# Altium PCB NiMH Battery Charger.PcbDoc
Units mil, origin at the board's own origin, x right, y up, seen from the top; angles counter-clockwise.
Board outline 2050 x 1425 mil, 2 copper layers (Top Layer, Bottom Layer); 36 components, 25 nets, 108 pads, 22 vias.
Unrouted connection lines stored in the file: 1.
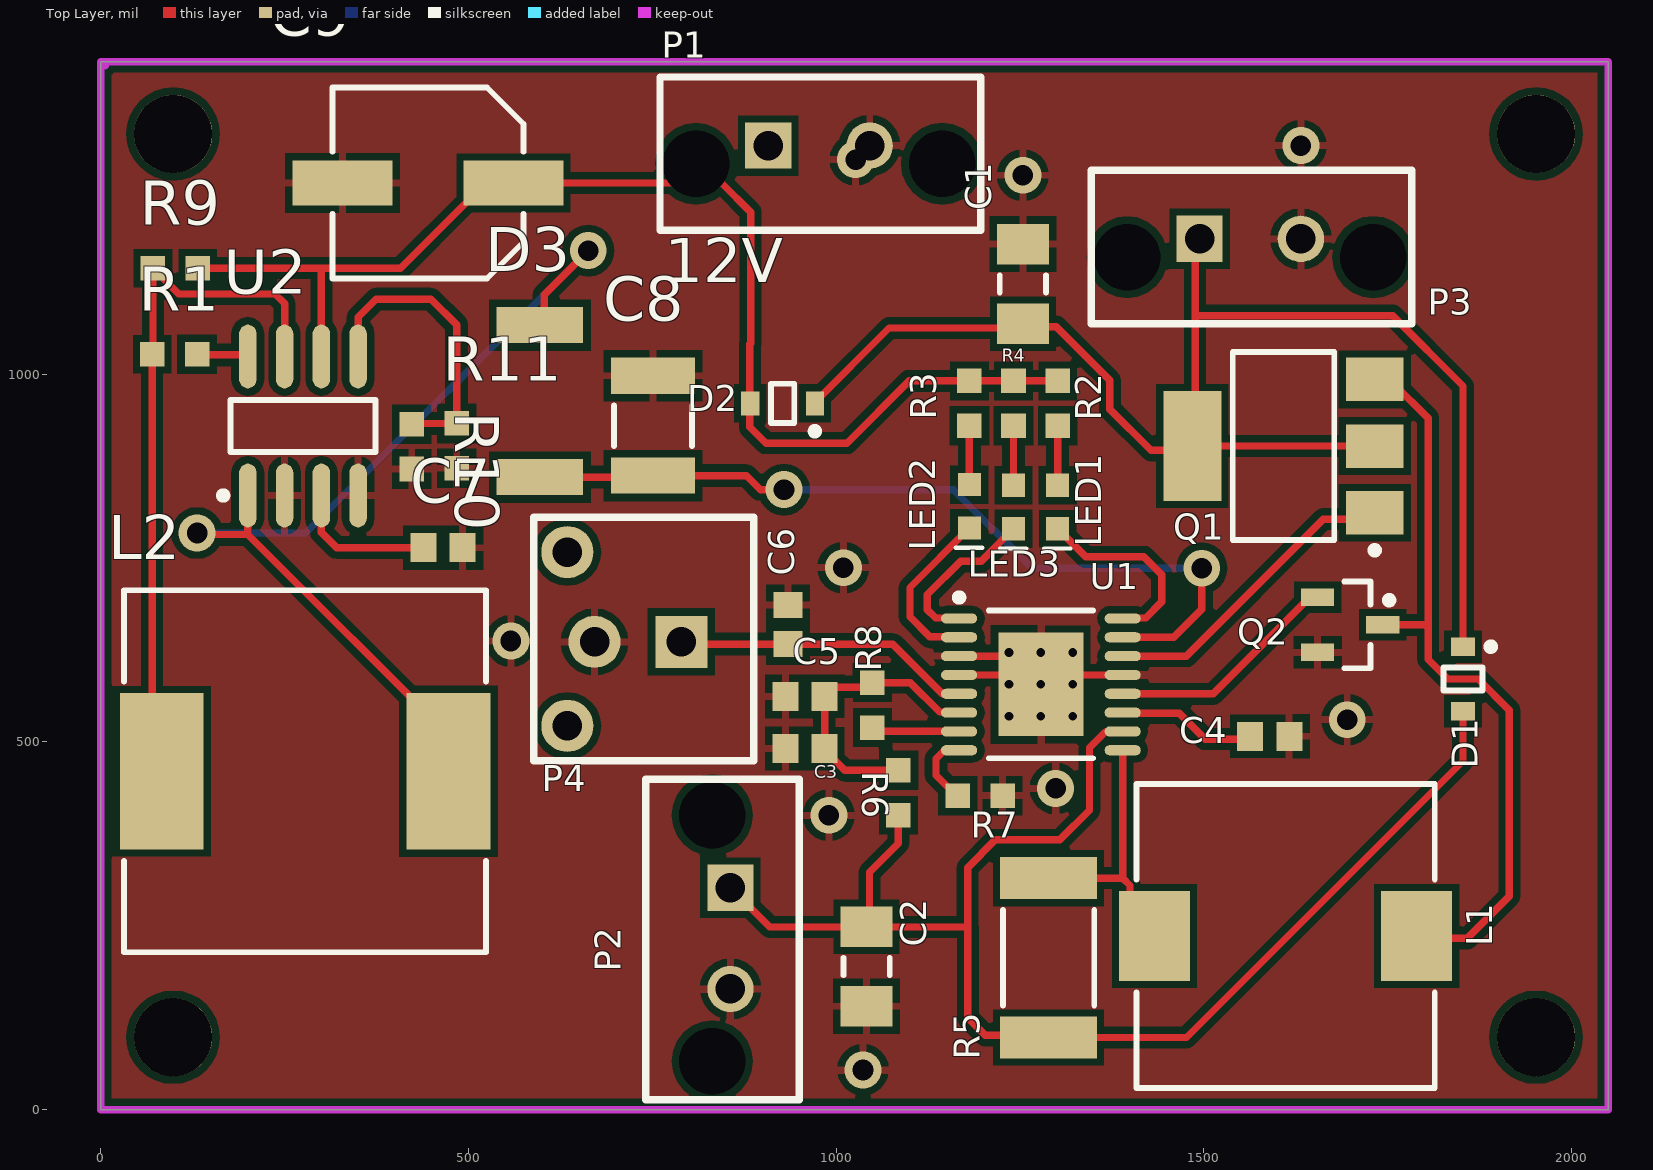
[diagram p0: Top Layer view]
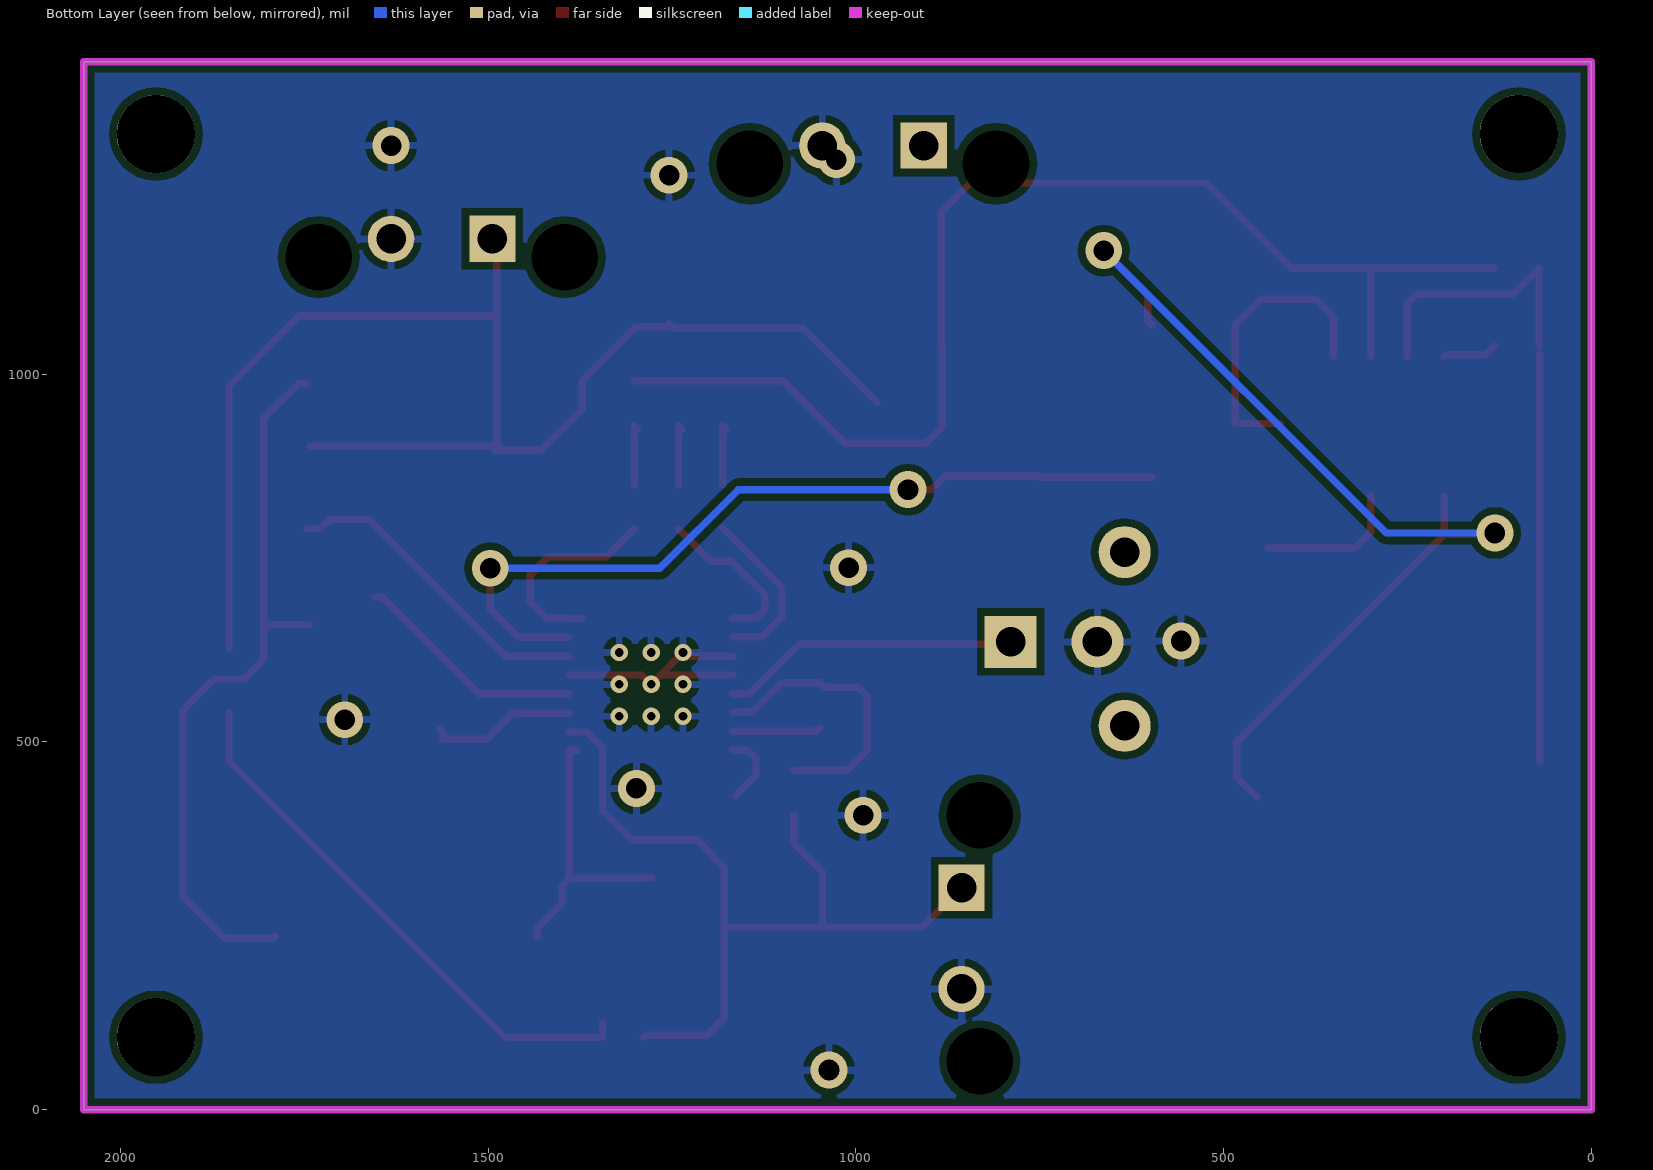
[diagram p1: Bottom Layer view, seen from below]
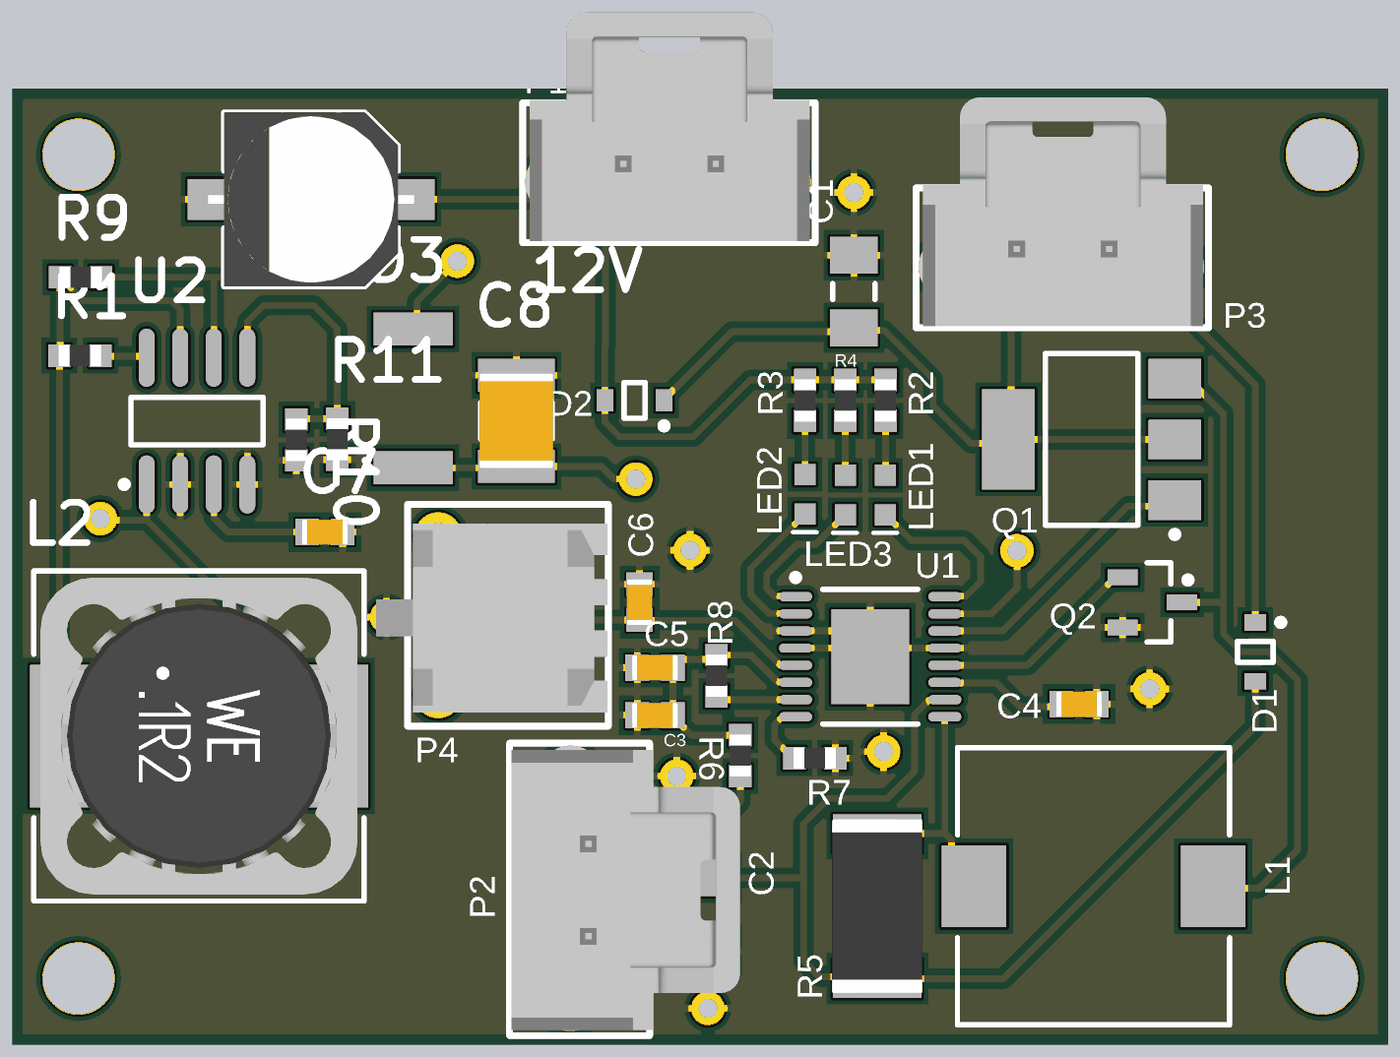
[diagram p2: 3D render of the assembled board from above, using the file's embedded part models]

## Layer stack, top to bottom
Top Solder: solder mask 0.4, Solder Resist, Dk 3.5
Top Layer: signal copper 1.4
Dielectric 1: dielectric 12.6, FR-4, Dk 4.8
Bottom Layer: signal copper 1.4
Bottom Solder: solder mask 0.4, Solder Resist, Dk 3.5

## Board outline
0,0 2050,0 2050,1425 0,1425

## Design rules (kind name [scope] priority, off if disabled: settings)
Clearance [All] p1: gap=10 ignorepadtopadclearanceinfootprint=FALSE except(0: Arc-Hole Track-Hole SMDPad-Hole THPad-Hole Via-Hole Fill-Hole Poly-Hole Region-Hole Text-Hole)
PolygonConnect [All] p1: connectstyle=Relief reliefconductorwidth=10 reliefentries=4 polygonreliefangle="90 Angle" airgapwidth=10
RoutingVias [All] p1: holewidth=28 width=50 viastyle="Through Hole" minholewidth=28 minwidth=50 maxholewidth=28 maxwidth=50
SolderMaskExpansion [All] p1: expansion=4
Width [All] p1: maxlimit=10 minlimit=10 preferedwidth=10
30 further rules are at their usual default settings.

## Classes and differential pairs
component class "NiMH Battery Charger": C1 C2 C3 C4 C5 C6 C7 C8 C9 D1 D2 D3 L1 L2 LED1 LED2 LED3 P1 P2 P3 P4 Q1 Q2 R1 R2 R3 R5 R6 R7 R9 R11 U1 U2

## Components (designator, comment, footprint, x,y, rotation, side; value= is the part's Value field where it differs from the comment)
C1 "CAP CER 10uF 50V 20% X5R 1206" "CAP, 1206" 1253.91,1122.73 r90 top
C2 "CAP CER 10uF 50V 20% X5R 1206" "CAP, 1206" 1041.31,194.58 r270 top
C3 "CAP CER 10nF 50V 5% X7R 0603" "CAP, 0603" 957.65,490.84 r180 top
C4 "CAP CER 0.1UF 50V 10% X7R 0603" "CAP, 0603" 1589.54,507.57 r0 top
C5 "CAP CER 10nF 50V 5% X7R 0603" "CAP, 0603" 957.65,561.71 r180 top
C6 "68nF" "CAP, 0603" 934.56,659.43 r90 top
C7 "1500PF, 50V" "CAP, 0603" 465.57,764 r0 top
C8 "CAP CER 330UF 6.3V X5R 1210" "CAP, 1210" 751,929.91 r90 top
C9 "100UF" "CAP ALUM 6.3MM RADIAL SMD" 444.94,1260 r180 top
D1 "NSR1020MW2T3G" ONSC-SOD-323-2-477-02_V 1852.17,585.49 r270 top
D2 "NSR1020MW2T3G" ONSC-SOD-323-2-477-02_V 927.13,960.33 r180 top
D3 "40V 1A" MELF 597,963.35 r90 top
L1 "IND 10UH 2.8A 59 MOHM SMD" INDP100102X31N 1611.19,235.92 r180 top
L2 "180 µH" WE-PD-XL 277.88,460 r0 top
LED1 "LED GREEN CLEAR 2V 0603" LED_0603 1300.76,846.91 r270 top
LED2 "LED YELLOW CLEAR 2.1V 0603" LED_0603 1180.76,847.85 r270 top
LED3 "LED RED CLEAR 2V 0603" LED_0603 1240.76,846.91 r270 top
P1 "CONN 2POS ULTRA-FIT 0.138\"" "CONN, 2POS ULTRA-FIT" 907.78,1310.8 r0 top
P2 "CONN 2POS ULTRA-FIT 0.138\"" "CONN, 2POS ULTRA-FIT" 856.27,301.87 r270 top
P3 "CONN 2POS ULTRA-FIT 0.138\"" "CONN, 2POS ULTRA-FIT" 1494.06,1183.95 r0 top
P4 "CONN 2POS MICRO-FIT 3mm" "CONN, 2POS MICRO-FIT" 789.56,639.94 r90 top
Q1 "NTF2955T1G" ONSC-SOT-223-4-318E-04_V 1608.24,902.26 r0 top
Q2 "MOSFET N-CHANNEL 20V 4A SOT23F" SOT23 1698.79,659.15 r0 top
R1 "180Ω" "RES, 0603" 100.49,1027 r180 top
R2 "RES 10K OHM 1% 1/10W 0603" "RES, 0603" 1301.15,960.33 r270 top
R3 "RES 10K OHM 1% 1/10W 0603" "RES, 0603" 1181.15,960.33 r270 top
R4 "RES 10K OHM 1% 1/10W 0603" "RES, 0603" 1241.15,960.33 r270 top
R5 "0.05Ω" RESC6432X89X76LL25T25 1288.85,206.39 r270 top
R6 "180k" "RES, 0603" 1084.61,430.8 r270 top
R7 "49.9k" "RES, 0603" 1195.83,426.87 r180 top
R8 "20k" "RES, 0603" 1049.18,549.9 r90 top
R9 "0.22Ω" "RES, 0603" 101.51,1144 r180 top
R10 "2.21K" "RES, 0603" 423,901.49 r270 top
R11 "47K" "RES, 0603" 484,902.49 r270 top (schematic designator D4)
U1 "LTC4010CFE#PBF" LT-FE-16-EPV-BC_L 1278.34,578.2 r0 top
U2 "MC34063ACD-TR" SO8_N 275,929.51 r90 top

## Footprints (in the part's own frame and the unit in brackets; to place one, negate y for a bottom-side part, rotate by r counter-clockwise, add the part's x,y. Pads: shape width x height; smd on the part's side, far side on the other; paste and mask are expansions set on the pad)
"CAP ALUM 6.3MM RADIAL SMD" [mm] "Aluminum Electrolytic Capacitor, Body 6.50x6.50x5.50mm, IPC Low Density"
  rect 3.45x1.55 smd: 1(-2.95,0) 2(2.95,0)
  silkscreen extent -3.3,-3.3 3.3,3.3, body extent -3.9,-3.3 3.9,3.3, height 5.5
"CAP, 0603" [mm] "Chip Capacitor, 2-Leads, Body 1.60x0.81mm, IPC Medium Density"
  rect 0.9x1 smd mask+0.076: 1(-0.675,0) 2(0.675,0)
  body extent -0.87,-0.48 0.87,0.48, height 0.9
"CAP, 1206" [mm] "Chip Capacitor, 2-Leads, Body 3.20x1.60mm, IPC Medium Density"
  rect 1.4x1.8 smd: 1(-1.375,0) 2(1.375,0)
  silkscreen extent -0.3,-0.8 0.3,0.8, body extent -1.68,-0.87 1.67,0.87, height 1.8
"CAP, 1210" [mm] "Chip Capacitor, 2-Leads, Body 3.20x2.50mm, IPC Low Density"
  rect 1.25x2.9 smd: 1(-1.725,0) 2(1.725,0)
  silkscreen extent -0.7,-1.35 0.7,1.35, body extent -1.8,-1.4 1.8,1.4, height 2.8
"CONN, 2POS MICRO-FIT" [mm]
  round 1.8 hole 1.02: 0(-3,3.94) 0(3,3.94) 2(-0.1,3)
  rect 1.8x1.8 hole 1.02: 1(-0.1,0)
  silkscreen extent -4.2,-2.5 4.2,5.1, body extent -3.67,-2.47 3.48,6.3, height 9.95
"CONN, 2POS ULTRA-FIT" [mm] "2 Positions Header, Shrouded Connector 0.138\" (3.50mm) Through Hole Gold"
  rect 1.6x1.6 hole 1.02: 1(0,0)
  round 1.6 hole 1.02: 2(3.5,0)
  round 1.6 hole 2.3: ""(-2.5,-0.63) ""(6,-0.63)
  silkscreen extent -3.74,-2.93 7.33,2.37, body extent -3.48,-2.87 7.12,5.79, height 13.85
INDP100102X31N [mm] "Precision Wire Wound Inductor, 2-Leads, Body 10.00x10.20mm, IPC Medium Density"
  rect 2.45x3.1 smd: 1(-4.525,0) 2(4.525,0)
  silkscreen extent -5.15,-5.25 5.15,5.25, body extent -5.15,-5.25 5.15,5.25, height 3.1
LED_0603 [mm]
  rect 0.8x0.8 smd: 1(-0.05,0.01) 2(1.45,0.01)
  silkscreen extent 2.13,-0.46 2.13,0.45, body extent -0.09,-0.39 1.51,0.41, height 0.8
LT-FE-16-EPV-BC_L [mm] "SOP, 16-Leads, Body 5.1x4.5mm, Pitch 0.65mm, Thermal Pad 3.58x2.94mm, IPC High Density"
  oval 1.25x0.35 smd: 1(-2.825,2.275) 2(-2.825,1.625) 3(-2.825,0.975) 4(-2.825,0.325) 5(-2.825,-0.325) 6(-2.825,-0.975) 7(-2.825,-1.625) 8(-2.825,-2.275) 9(2.825,-2.275) 10(2.825,-1.625) 11(2.825,-0.975) 12(2.825,-0.325) 13(2.825,0.325) 14(2.825,0.975) 15(2.825,1.625) 16(2.825,2.275)
  rect 2.94x3.58 smd: 17(0,0)
  silkscreen extent -2.95,-2.55 1.8,3.12, body extent -2.25,-2.55 2.25,2.55, height 1.1
MELF [mm]
  rect 1.25x3 smd: 1(2.625,0) 2(-2.625,0)
ONSC-SOD-323-2-477-02_V [mm] "SOD, 2-Leads, Body 1.7x1.25mm"
  rect 0.63x0.83 smd: 1(-1.115,0) 2(1.115,0)
  silkscreen extent -1.24,-0.67 0.4,1.09, body extent -0.85,-0.63 0.85,0.63, height 1.06
ONSC-SOT-223-4-318E-04_V [mm] "SOT223, 4-Leads"
  rect 2x1.5 smd: 1(3.15,-2.3) 2(3.15,0) 3(3.15,2.3)
  rect 2x3.8 smd: 4(-3.15,0)
  silkscreen extent -1.75,-3.72 3.27,3.25, body extent -1.75,-3.25 1.75,3.25, height 1.75
"RES, 0603" [mm] "Chip Resistor, 2-Leads, Body 1.60x0.80mm, IPC Medium Density"
  rect 0.85x0.85 smd: 1(-0.775,0) 2(0.775,0)
  body extent -0.8,-0.4 0.8,0.4, height 0.55
RESC6432X89X76LL25T25 [mm] "Chip Resistor, 2-Leads, Body 6.6x3.43mm, IPC High Density"
  rect 1.45x3.35 smd: 1(-2.75,0) 2(2.75,0)
  silkscreen extent -1.65,-1.58 1.65,1.58, body extent -3.3,-1.72 3.3,1.72, height 0.89
SO8_N [mm] "SOIC, 8-Leads, Body 4.9x3.9mm, Pitch 1.27mm, IPC Medium Density"
  oval 2.2x0.6 smd: 1(-2.4,1.905) 2(-2.4,0.635) 3(-2.4,-0.635) 4(-2.4,-1.905) 5(2.4,-1.905) 6(2.4,-0.635) 7(2.4,0.635) 8(2.4,1.905)
  silkscreen extent -2.52,-2.5 0.9,2.88, body extent -2,-2.5 2,2.5, height 1.75
SOT23 [mm] "SOT23, 3-Leads, Body 2.9x1.3mm, Pitch 0.95mm, Lead Span 2.3mm - Reverse Pinning, IPC Medium Density"
  rect 1.15x0.6 smd: 1(1.125,0) 2(-1.125,-0.95) 3(-1.125,0.95)
  silkscreen extent -0.2,-1.5 1.48,1.5, body extent -0.7,-1.5 0.7,1.5, height 1.1
WE-PD-XL [mm] "SMD Inductor, 2-Leads, Body 12.0 x 12.0 mm"
  rect 2.9x5.4 smd: 1(-4.95,0) 2(4.95,0)
  silkscreen extent -6.25,-6.25 6.25,6.25, body extent -6,-6 6,6, height 7.99

## Part data
C1 C2: "10μF ±20% 50V Ceramic Capacitor X5R 1206 (3216 Metric)", Capacitance="10 uF", Case/Package=1206, Case Code (Metric)=3216, Manufacturer=Murata, Manufacturer Part Number=GRT31CR61H106ME01L, Max Operating Temperature=85°C, Min Operating Temperature=-55°C, Rating=X5R, Ratings=AEC-Q200, Supplier Part Number 1=490-12457-1-ND, Tolerance=20%, Voltage Rating=50V, Case Code (Imperial)=1206, Length=0.126inch, Mount="Surface Mount", Packaging="Tape and Reel", Pricing 1="1 = 0.57000, 10 = 0.39800, 100 = 0.23910, 500 = 0.17930, 1000 = 0.15141 (USD)", RoHS=Yes, Stock 1=449467, Supplier 1=Digi-Key, Thickness=0.071inch, Width=0.063inch
C3 C5: "10000pF ±5% 50V Ceramic Capacitor U2J 0603 (1608 Metric)", Capacitance=10000pF, Manufacturer 1=KEMET, Manufacturer Part Number 1=C0603C103J5JAC7867, Operating Temperature="-55°C ~ 125°C", Package / Case="0603 (1608 Metric)", Ratings=-, Supplier Part Number 1=399-13384-1-ND, Temperature Coefficient=U2J, Tolerance=±5%, Voltage=50V, ComponentLink1Description=http://www.kemet.com/docfinder?Partnumber=C0603C103J5JAC7867, ComponentLink1URL=http://www.kemet.com/docfinder?Partnumber=C0603C103J5JAC7867, Failure Rate=-, Height - Seated (Max)=-, Lead Spacing=-, Lead Style=-, Mounting Type="Surface Mount, MLCC", Packaging="Cut Tape (CT)", Part Status=Active, Size / Dimension="0.063\" L x 0.032\" W (1.60mm x 0.80mm)", Supplier 1=Digi-Key, Thickness (Max)="0.034\" (0.87mm)"
C4: "0.10μF ±10% 50V Ceramic Capacitor X7R 0603 (1608 Metric)", Capacitance=0.1μF, Manufacturer 1="AVX Corporation", Manufacturer Part Number 1=06035C104KAT2A, Operating Temperature="-55°C ~ 125°C", Package / Case="0603 (1608 Metric)", Ratings=-, Supplier Part Number 1=478-5052-1-ND, Temperature Coefficient=X7R, Tolerance=±10%, Voltage=50V, ComponentLink1Description=http://datasheets.avx.com/X7RDielectric.pdf, ComponentLink1URL=http://datasheets.avx.com/X7RDielectric.pdf, Height - Seated (Max)=-, Lead Spacing=-, Lead Style=-, Mounting Type="Surface Mount, MLCC", Packaging="Cut Tape (CT)", Part Status=Active, Size / Dimension="0.063\" L x 0.032\" W (1.60mm x 0.81mm)", Supplier 1=Digi-Key, Thickness (Max)="0.035\" (0.90mm)"
C6: library part "CAP CER 0.068UF 10% 50V X7R 0603", "0.068μF 50V Ceramic Capacitor X7R 0603 (1608 Metric) 0.063\" L x 0.032\" W (1.60mm x 0.80mm)", Case/Package=0603, Case Code (Metric)=1608, Dielectric=X7R, Manufacturer=Murata, Manufacturer Part Number=GCM188R71H683KA57D, Max Operating Temperature=125°C, Min Operating Temperature=-55°C, Package Quantity=4000, Supplier Part Number 1=490-8027-1-ND, Tolerance=10%, Voltage Rating=50V, Capacitance=68nF, Case Code (Imperial)=0603, ComponentLink1Description=https://datasheet.ciiva.com/29542/s0717e-29542427.pdf, ComponentLink1URL=https://datasheet.ciiva.com/29542/s0717e-29542427.pdf, ComponentLink2Description=https://datasheet.ciiva.com/29542/s0717e-29542428.pdf, ComponentLink2URL=https://datasheet.ciiva.com/29542/s0717e-29542428.pdf, ComponentLink3Description=https://datasheet.ciiva.com/29542/s0717e-29542429.pdf, ComponentLink3URL=https://datasheet.ciiva.com/29542/s0717e-29542429.pdf, Depth=0.8mm, Height=0.8mm, Length=1.6mm, Mount="Surface Mount", Packaging="Tape and Reel", Pricing 1="1=0.16, 10=0.116, 100=0.0547, 500=0.03832, 1000=0.03172 (USD)", Radiation Hardening=No, Stock 1=40000, Supplier 1=Digi-Key, Termination=SMD/SMT, Thickness=0.035inch, Voltage Rating (DC)=50V, Width=0.031inch
C7: library part "CAP, 1500PF, 50V, 10%, X7R, 0603", "KEMET - C0603C152K5RACTU - CAP, 1500PF, 50V, 10%, X7R, 0603", Capacitance=1.5nF, Case/Package=0603, Case Code (Metric)=1608, Dielectric=X7R, Dielectric Material=Ceramic, Manufacturer 1=KEMET, Manufacturer Part Number 1=C0603C152K5RACTU, Max Operating Temperature=125°C, Min Operating Temperature=-55°C, Package Quantity=1, Tolerance=10%, Voltage=50V, Case Code (Imperial)=0603, ComponentLink1Description=https://datasheet.ciiva.com/7824/kem-c1002-x7r-smd-7824006.pdf?src-supplier=Element14, ComponentLink1URL=https://datasheet.ciiva.com/7824/kem-c1002-x7r-smd-7824006.pdf?src-supplier=Element14, ComponentLink2Description=https://datasheet.ciiva.com/28645/1851736-28645673.pdf?src-supplier=Element14, ComponentLink2URL=https://datasheet.ciiva.com/28645/1851736-28645673.pdf?src-supplier=Element14, ComponentLink3Description=https://datasheet.ciiva.com/7823/40889-7823642.pdf?src-supplier=Element14, ComponentLink3URL=https://datasheet.ciiva.com/7823/40889-7823642.pdf?src-supplier=Element14, ComponentLink4Description=https://datasheet.ciiva.com/18192/getdatasheetpartid-104358-18192810.pdf?src-supplier=Verical, ComponentLink4URL=https://datasheet.ciiva.com/18192/getdatasheetpartid-104358-18192810.pdf?src-supplier=Verical, ComponentLink5Description=https://datasheet.ciiva.com/7823/40889-7823643.pdf?src-supplier=Element14, ComponentLink5URL=https://datasheet.ciiva.com/7823/40889-7823643.pdf?src-supplier=Element14, ComponentLink6Description=https://datasheet.ciiva.com/6177/kem-c1002-x7r-smd-6177916.pdf?src-supplier=Farnell, ComponentLink6URL=https://datasheet.ciiva.com/6177/kem-c1002-x7r-smd-6177916.pdf?src-supplier=Farnell, ComponentLink7Description=https://datasheet.ciiva.com/14597/70095383-14597806.pdf?src-supplier=Allied+Electronics, ComponentLink7URL=https://datasheet.ciiva.com/14597/70095383-14597806.pdf?src-supplier=Allied+Electronics, Contact Plating=Tin,Matte, Depth=0.8mm, Dissipation Factor=2.5%, Height=0.8mm, Lead Pitch=0.7mm, Length=1.6mm, Mount="Surface Mount,PCB", Number of Pins=2, Packaging="Tape and Reel", Pricing 1="1=0.10000, 10=0.05000, 100=0.02230, 500=0.01594, 1000=0.01252 (USD)", Radiation Hardening=No, REACH SVHC="No SVHC", RoHS=Yes, Stock 1=207623, Supplier 1=Digi-Key, Termination=SMD/SMT, Thickness=0.034inch, Voltage Rating=50V, Voltage Rating (DC)=50V, Width=0.8mm
C8: "330μF ±20% 6.3V Ceramic Capacitor X5R 1210 (3225 Metric)", Manufacturer="Taiyo Yuden", Manufacturer Part Number=JMK325ABJ337MM-P, Supplier Part Number 1=587-5449-1-ND, Pricing 1="1=5.57, 10=4.492, 100=3.5039, 500=2.6055 (USD)", Stock 1=1427, Supplier 1=Digi-Key
C9: library part "CAP ALUM 100UF 20% 35V SMD", "100μF 35V Aluminum Electrolytic Capacitors Radial, Can - SMD 2000 Hrs @ 85°C", Capacitance=100uF, Case/Package=Radial, Leakage Current=3uA, Manufacturer 1=Panasonic, Manufacturer Part Number 1=EEE-1VA101XP, Max Operating Temperature=85°C, Min Operating Temperature=-40°C, Package Quantity=900, Ripple Current=132mA, Supplier Part Number 1=PCE3951CT-ND, Tolerance=20%, Voltage=35V, ComponentLink1Description=https://datasheet.ciiva.com/46378/aba0000ce2-46378341.pdf, ComponentLink1URL=https://datasheet.ciiva.com/46378/aba0000ce2-46378341.pdf, ComponentLink2Description=https://datasheet.ciiva.com/17535/aba0000ce2-17535510.pdf, ComponentLink2URL=https://datasheet.ciiva.com/17535/aba0000ce2-17535510.pdf, ComponentLink3Description=https://datasheet.ciiva.com/30170/11aba0000ce2-30170103.pdf, ComponentLink3URL=https://datasheet.ciiva.com/30170/11aba0000ce2-30170103.pdf, ComponentLink4Description=https://datasheet.ciiva.com/31414/aba0000ce2-31414696.pdf, ComponentLink4URL=https://datasheet.ciiva.com/31414/aba0000ce2-31414696.pdf, ComponentLink5Description=https://datasheet.ciiva.com/24068/aba0000ce2-40801-24068089.pdf, ComponentLink5URL=https://datasheet.ciiva.com/24068/aba0000ce2-40801-24068089.pdf, ComponentLink6Description=https://datasheet.ciiva.com/14591/70255710-14591771.pdf, ComponentLink6URL=https://datasheet.ciiva.com/14591/70255710-14591771.pdf, ComponentLink7Description=https://datasheet.ciiva.com/14600/70255710-14600731.pdf, ComponentLink7URL=https://datasheet.ciiva.com/14600/70255710-14600731.pdf, ComponentLink8Description=https://datasheet.ciiva.com/46374/aba0000ce2-46374427.pdf, ComponentLink8URL=https://datasheet.ciiva.com/46374/aba0000ce2-46374427.pdf, ComponentLink9Description=https://datasheet.ciiva.com/11673/aba0000ce2-11673887.pdf, ComponentLink9URL=https://datasheet.ciiva.com/11673/aba0000ce2-11673887.pdf, Contact Plating=Tin, Description 1="Cap Aluminum Lytic 100uF 35V 20% (6.3 X 7.7mm) SMD 132mA 2000h 85C Automotive T/R", Diameter=6.3mm, Height=7.7mm, Height - Seated (Max)=0.303inch, Lead Free="Lead Free", Length=8mm, Life (Hours)=2000Hour, Mount="Surface Mount,PCB", Number of Pins=8, Packaging="Tape and Reel", Polarity=Polar, Pricing 1="1=0.44, 10=0.304, 100=0.1822 (USD)", Radiation Hardening=No, REACH SVHC="No SVHC", Ripple Current (AC)=132mA, Stock 1=170823, Supplier 1=Digi-Key, Termination=SMD/SMT, Voltage Rating=35V, Voltage Rating (DC)=35V
D1 D2: library part CMP-1055-00469-1, "Schottky Barrier Diode, 2-Pin SOD-323, Pb-Free, Tape and Reel", Manufacturer="On Semiconductor", ComponentLink1Description="Manufacturer URL", ComponentLink1URL=http://www.onsemi.com/, ComponentLink2Description=Datasheet, ComponentLink2URL=http://www.onsemi.cn/pub_link/Collateral/NSR1020MW2T1-D.PDF, ComponentLink3Description="Package Specification", ComponentLink3URL=http://www.onsemi.com/pub_link/Collateral/477-02.PDF.1, Configuration=Single, DatasheetVersion="Rev. 1", IFSM Max (A)=5, Mounting Technology="Surface Mount", PackageDescription="2-Pin SOD, Body 1.7 x 1.25 mm", PackageReference=SOD-323-2-477-02, PackageVersion="Rev. H, 03/2007", Packing="Tape and Reel", PartNumber=NSR1020MW2T3G, RoHS=TRUE
D3: library part "DIODE SCHOTTKY 40V 1A MELF", "Diode Schottky 40V 1A Surface Mount MELF"
L1: "10μH Shielded Inductor 2.8A 59 mOhm Max Nonstandard", Case/Package=Nonstandard, Current Rating=2.8A, DC Resistance (DCR)=59mR, Inductance=10uh, Manufacturer=Sumida, Manufacturer Part Number=CDRH103RNP-100NC-B, Max Operating Temperature=100°C, Min Operating Temperature=-40°C, Package Quantity=1000, Saturation Current=3.18A, Supplier Part Number 1=308-1910-1-ND, Test Frequency=100kHz, Tolerance=30%, ComponentLink1Description=http://www.mouser.com/ds/2/390/CDRH103R-523372.pdf, ComponentLink1URL=http://www.mouser.com/ds/2/390/CDRH103R-523372.pdf, ComponentLink2Description=http://www.sumida.com/products/pdf/CDRH103R.pdf, ComponentLink2URL=http://www.sumida.com/products/pdf/CDRH103R.pdf, ComponentLink3Description=http://products.sumida.com/products/pdf/CDRH103R.pdf, ComponentLink3URL=http://products.sumida.com/products/pdf/CDRH103R.pdf, Core Material=Ferrite, Depth=10.3mm, Height=3.1mm, Height - Seated (Max)=0.122inch, Lead Free="Lead Free", Length=0.402inch, Max DC Current=2.8A, Mount="Surface Mount", Packaging="Tape and Reel", Pricing 1="1=1.53, 10=1.42, 100=1.027, 500=0.7866 (USD)", Radiation Hardening=No, Shielding=Shielded, Stock 1=69, Supplier 1=Digi-Key, Termination=SMD/SMT, Width=0.394inch
L2: library part "IND 180 μH Power Inductor", "SMD-Shielded Power Inductor WE-PD, L = 180 μH", Inductance="180 ?μH", ComponentLink1Description="Manufacturer Link", ComponentLink1URL=http://www.we-online.com, ComponentLink2Description=Datasheet, ComponentLink2URL=http://www.we-online.de/katalog/media/pdf/744770218.pdf, DatasheetVersion="ver 5, Oct-2004", PackageDescription="SMD Inductor, 2-Leads, Body 12.0 x 12.0 mm", PackageReference=WE-PD-XL, PackageVersion=2004
LED1: "Green 572nm LED Indication - Discrete 2V 0603 (1608 Metric)", Color=Green, Current - Test=20mA, Lens Color=Colorless, Manufacturer="Wurth Electronics Inc.", Manufacturer Part Number=150060VS75000, Millicandela Rating=40mcd, Package / Case="0603 (1608 Metric)", Supplier Device Package=0603, Supplier Part Number 1=732-4980-1-ND, Voltage - Forward (Vf) (Typ)=2V, Category=Optoelectronics, ComponentLink1Description=http://katalog.we-online.de/led/datasheet/150060VS75000.pdf, ComponentLink1URL=http://katalog.we-online.de/led/datasheet/150060VS75000.pdf, Features=-, Height (Max)=0.80mm, Lens Style/Size="Rectangle with Flat Top, 1.10mm x 0.70mm", Lens Transparency=Clear, Mounting Type="Surface Mount", Packaging="Cut Tape (CT)", Part Status=Active, Pricing 1="1=0.21, 100=0.1617, 500=0.13964 (CAD)", RoHS="RoHS Compliant", Size / Dimension="1.60mm L x 0.80mm W", Stock 1=9408, Supplier 1=Digi-Key, Viewing Angle=140°, Wavelength - Dominant=570nm, Wavelength - Peak=572nm
LED2: "Yellow 590nm LED Indication - Discrete 2V 0603 (1608 Metric)", Color=Yellow, Current - Test=20mA, Lens Color=Colorless, Manufacturer="Wurth Electronics Inc.", Manufacturer Part Number=150060YS75000, Millicandela Rating=120mcd, Package / Case="0603 (1608 Metric)", Supplier Device Package=0603, Supplier Part Number 1=732-4981-1-ND, Voltage - Forward (Vf) (Typ)=2V, Category=Optoelectronics, ComponentLink1Description=http://katalog.we-online.de/led/datasheet/150060YS75000.pdf, ComponentLink1URL=http://katalog.we-online.de/led/datasheet/150060YS75000.pdf, Features=-, Height (Max)=0.80mm, Lens Style/Size="Rectangle with Flat Top, 1.10mm x 0.70mm", Lens Transparency=Clear, Mounting Type="Surface Mount", Packaging="Cut Tape (CT)", Part Status=Active, Pricing 1="1=0.21, 100=0.1617, 500=0.13964 (CAD)", RoHS="RoHS Compliant", Size / Dimension="1.60mm L x 0.80mm W", Stock 1=10523, Supplier 1=Digi-Key, Viewing Angle=140°, Wavelength - Dominant=590nm, Wavelength - Peak=595nm
LED3: "Red 631nm LED Indication - Discrete 2V 0603 (1608 Metric)", Color=Red, Current - Test=20mA, Lens Color=Colorless, Manufacturer="Wurth Electronics Inc.", Manufacturer Part Number=150060RS75000, Millicandela Rating=250mcd, Package / Case="0603 (1608 Metric)", Supplier Device Package=0603, Supplier Part Number 1=732-4978-1-ND, Voltage - Forward (Vf) (Typ)=2V, Category=Optoelectronics, ComponentLink1Description=http://katalog.we-online.de/led/datasheet/150060RS75000.pdf, ComponentLink1URL=http://katalog.we-online.de/led/datasheet/150060RS75000.pdf, Features=-, Height (Max)=0.80mm, Lens Style/Size="Rectangle with Flat Top, 1.10mm x 0.70mm", Lens Transparency=Clear, Mounting Type="Surface Mount", Packaging="Cut Tape (CT)", Part Status=Active, Pricing 1="1=0.21, 100=0.1617, 500=0.13964 (CAD)", RoHS="RoHS Compliant", Size / Dimension="1.60mm L x 0.80mm W", Stock 1=35521, Supplier 1=Digi-Key, Viewing Angle=140°, Wavelength - Dominant=625nm, Wavelength - Peak=630nm
P1 P2 P3: "Connector Header Through Hole 2 position 0.138\" (3.50mm)", Color=Black, Manufacturer=Molex, Manufacturer Part Number=1722871102, Supplier Part Number 1=WM11701-ND, ComponentLink1Description=http://www.molex.com/pdm_docs/sd/1722861302_sd.pdf, ComponentLink1URL=http://www.molex.com/pdm_docs/sd/1722861302_sd.pdf, Connector Type="Male Pin", Contact Plating=Tin, Fastening Type=Latch, Mount="Through Hole", Number of Positions=2, Number of Rows=1, Packaging=Tray, Pitch=0.138inch, Pricing 1="1 = 0.78000, 10 = 0.68800, 100 = 0.59380, 500 = 0.48582, 1000 = 0.43184, 5000 = 0.37786, 10000 = 0.35897 (USD)", RoHS=Yes, Series=UltraFit, Stock 1=2743, Supplier 1=Digi-Key, Termination=Solder
P4: "Connector Header Through Hole 2 position", Contact Resistance=10mR, Current Rating=5A, Housing Colour=Black, Manufacturer=Molex, Manufacturer Part Number=43045-0227, Max Operating Temperature=105°C, Max Voltage Rating (DC)=250.25kV, Min Operating Temperature=-40°C, Package Quantity=3168, Supplier Part Number 1=WM10657-ND, Voltage Rating=600V, ComponentLink1Description=http://www.onlinecomponents.com/productFiles/mf-MOL/307170430450227_pcb_headers.pdf, ComponentLink1URL=http://www.onlinecomponents.com/productFiles/mf-MOL/307170430450227_pcb_headers.pdf, ComponentLink2Description=http://www.mouser.com/ds/2/276/0430450227_PCB_HEADERS-142611.pdf, ComponentLink2URL=http://www.mouser.com/ds/2/276/0430450227_PCB_HEADERS-142611.pdf, ComponentLink3Description=http://uk.rs-online.com/webdocs/13c3/0900766b813c3a46.pdf, ComponentLink3URL=http://uk.rs-online.com/webdocs/13c3/0900766b813c3a46.pdf, ComponentLink4Description=http://www.molex.com/webdocs/datasheets/pdf/en-us/0430450227_PCB_HEADERS.pdf, ComponentLink4URL=http://www.molex.com/webdocs/datasheets/pdf/en-us/0430450227_PCB_HEADERS.pdf, Contact Material=Brass, Contact Plating=Tin, Depth=8.77mm, Gender=Male, Glow Wire Compliant=Compliant, Halogen Free="Low Halogen", Housing Material=Thermoplastic, Length=7.15mm, Mount="Through Hole", Number of Circuits=2, Number of Contacts=2, Number of Ports=1, Number of Positions=2, Number of Rows=2, Number of Terminals=2, Orientation=Vertical, Packaging=Tray, Pitch=3mm, Pricing 1="1=0.84, 10=0.74, 25=0.6968, 50=0.6676, 100=0.6387, 250=0.5806, 500=0.52254, 1000=0.46448, 2500=0.42094 (USD)", Radiation Hardening=No, Row Spacing=3mm, Stock 1=3657, Supplier 1=Digi-Key, Termination=Solder
Q1: library part ONSC-PMOS-G1D2S3D4-4, "Power MOSFET, -60 V, -2.6 A, Single P-Channel, 4-Pin SOT-223, Pb-Free, Tape and Reel", Manufacturer="On Semiconductor", Package Type="SOT-223-4 / TO-261-4", Channel Polarity="P Channel", Ciss Typ (pF)=492, ComponentLink1Description="Manufacturer URL", ComponentLink1URL=http://www.onsemi.com/, ComponentLink2Description=Datasheet, ComponentLink2URL=http://www.onsemi.com/pub_link/Collateral/NTF2955-D.PDF, ComponentLink3Description="Package Specification", ComponentLink3URL=http://www.onsemi.com/pub_link/Collateral/318E-04.PDF, Configuration=Single, Coss Typ (pF)=165, Crss Typ (pF)=50, DatasheetVersion="Rev. 6", ID Max (A)=2.6, Mounting Technology="Surface Mount", PackageDescription="4-Pin Small Outline Transistor, Body 6.5 x 3.5 mm, Pitch 2.3 mm", PackageReference=SOT-223-4-318E-04, PackageVersion="Rev. N, 08/2009", Packing="Tape and Reel", PartNumber=NTF2955T1G, Qrr Typ (nC)=0.139, RoHS=Pb-Free, V(BR)DSS Min (V)=60, VGS(th) Max (V)=4, VGS Max (V)=20
Q2: Supplier Part Number 1=SSM3K345RLFCT-ND, Supplier 1=Digi-Key
R1 R9: library part "RES 180k Ohms", Manufacturer="Vishay Dale", Part Number=CRCW0402180KFKED, Supplier 1=Digi-Key
R2 R3 R4: "RES SMD 10K OHM 1% 1/10W 0603", Manufacturer 1=Yageo, Manufacturer Part Number 1=RC0603FR-0710KL, Operating Temperature="-55°C ~ 155°C", Package / Case="0603 (1608 Metric)", Power=1/10W, Resistance=10k, Supplier Device Package=0603, Supplier Part Number 1=311-10.0KHRCT-ND, Temperature Coefficient=±100ppm/°C, Tolerance=±1%, ComponentLink1Description=http://www.yageo.com/documents/recent/PYu-RC_Group_51_RoHS_L_7.pdf, ComponentLink1URL=http://www.yageo.com/documents/recent/PYu-RC_Group_51_RoHS_L_7.pdf, Composition="Thick Film", Failure Rate=-, Height - Seated (Max)="0.022\" (0.55mm)", Packaging="Cut Tape (CT)", Part Status=Active, Size / Dimension="0.063\" L x 0.031\" W (1.60mm x 0.80mm)", Supplier 1=Digi-Key
R5: library part RES-2, "Chip Resistor, 50 mOhm, +/- 1%, 1 W, -65 to 170 degC, 2512 (6432 Metric), RoHS, Tape and Reel", Manufacturer=Vishay, Package Description="2-Pin Surface Mount Device, Body 6.35 x 3.18 mm", Package Reference=2512, Power Rating=1W, Resistance=0.05ohm, Resistance Tolerance=±1%, Resistor Case Style=2512[6432Metric], Resistor Element Type=MetalStrip, Temperature Coefficient=±75ppm/°C, Automotive Qualification Standard=AEC-Q200, Datasheet URL=http://www.vishay.com/docs/30100/wsl.pdf, Datasheet Version=07/2016, Manufacturer URL=http://www.vishay.com/, Mounting Technology=SurfaceMount, MSL=MSL1-Unlimited, Packaging=CutTape, Product Range=WSLSeries, SVHC=NoSVHC(15-Jun-2015)
R6: library part RES, Manufacturer="Vishay Dale", Part Number=CRCW0402180KFKED
R7: library part CMP-2002-05244-1, Manufacturer=Bourns, Part Number=CR0402-FX-4992GLF
R8: library part RES, Manufacturer="Vishay Dale", Part Number=CRCW040220K0FKED
R10: library part "RES 2.21K OHM 1% 1/10W 0603", "2.21 kOhms ±1% 0.1W, 1/10W Chip Resistor 0603 (1608 Metric) Automotive AEC-Q200, Moisture Resistant Thick Film", Case/Package=0603, Case Code (Metric)=1608, Manufacturer=Yageo, Manufacturer Part Number=AC0603FR-072K21L, Max Operating Temperature=155°C, Max Power Dissipation=100mW, Min Operating Temperature=-55°C, Resistance=2.21kR, Supplier Part Number 1=YAG3586CT-ND, Temperature Coefficient=100ppm/°C, Tolerance=1%, Voltage Rating=50V, Working Voltage=75V, Case Code (Imperial)=0603, ComponentLink1Description=https://datasheet.ciiva.com/12576/pyu-ac-51-rohs-l-2-12576458.pdf, ComponentLink1URL=https://datasheet.ciiva.com/12576/pyu-ac-51-rohs-l-2-12576458.pdf, Composition="Thick Film", Height=0.022inch, Lead Free="Lead Free", Length=0.063inch, Number of Terminations=2, Packaging="Tape and Reel", Power Rating=100mW, Pricing 1="1=0.1, 10=0.029, 100=0.0117, 1000=0.00527, 2500=0.00458 (USD)", Stock 1=11020, Supplier 1=Digi-Key, Termination=SMD/SMT, Weight=7.1E-05oz, Width=0.8mm
R11: library part "RES 47K OHM 1% 1/10W 0603", "RES SMD 47K OHM 1% 1/10W 0603", Case/Package=0603, Case Code (Metric)=1608, Manufacturer 1=Vishay, Manufacturer Part Number 1=CRCW060347K0FKEA, Max Operating Temperature=155°C, Min Operating Temperature=-55°C, Package Quantity=5000, Power Rating=100mW, Resistance=47kR, Temperature Coefficient=100ppm/°C, Tolerance=1%, Voltage Rating=75V, Case Code (Imperial)=0603, ComponentLink1Description=https://datasheet.ciiva.com/11808/0900766b80d98afc-11808694.pdf?src-supplier=RSComponents, ComponentLink1URL=https://datasheet.ciiva.com/11808/0900766b80d98afc-11808694.pdf?src-supplier=RSComponents, ComponentLink2Description=https://datasheet.ciiva.com/16763/70201119-16763141.pdf?src-supplier=Allied+Electronics, ComponentLink2URL=https://datasheet.ciiva.com/16763/70201119-16763141.pdf?src-supplier=Allied+Electronics, ComponentLink3Description=https://datasheet.ciiva.com/16893/dcrcwe3-16893430.pdf?src-supplier=Avnet+Europe, ComponentLink3URL=https://datasheet.ciiva.com/16893/dcrcwe3-16893430.pdf?src-supplier=Avnet+Europe, ComponentLink4Description=https://datasheet.ciiva.com/5548/dcrcwe3-109170-5548727.pdf?src-supplier=Mouser, ComponentLink4URL=https://datasheet.ciiva.com/5548/dcrcwe3-109170-5548727.pdf?src-supplier=Mouser, ComponentLink5Description=https://datasheet.ciiva.com/7777/1720486-7777607.pdf?src-supplier=Element14, ComponentLink5URL=https://datasheet.ciiva.com/7777/1720486-7777607.pdf?src-supplier=Element14, ComponentLink6Description=https://datasheet.ciiva.com/7777/125364-7777562.pdf?src-supplier=Element14, ComponentLink6URL=https://datasheet.ciiva.com/7777/125364-7777562.pdf?src-supplier=Element14, ComponentLink7Description=https://datasheet.ciiva.com/3257/dcrcwe3-3257631.pdf?src-supplier=Avnet, ComponentLink7URL=https://datasheet.ciiva.com/3257/dcrcwe3-3257631.pdf?src-supplier=Avnet, ComponentLink8Description=https://datasheet.ciiva.com/16286/dcrcwe3-16286447.pdf?src-supplier=Future+Electronics, ComponentLink8URL=https://datasheet.ciiva.com/16286/dcrcwe3-16286447.pdf?src-supplier=Future+Electronics, Composition="Thick Film", Contact Plating=Tin, Depth=0.85mm, Height=0.45mm, Lead Free="Lead Free", Length=1.55mm, Military Standard=Not, Mount="Surface Mount", Packaging="Tape and Reel", Pricing 1="1=0.10000, 10=0.03600, 100=0.01460, 1000=0.00654, 2500=0.00568 (USD)", Radiation Hardening=No, REACH SVHC=Unknown, RoHS=Yes, Stock 1=303029, Supplier 1=Digi-Key, Termination=SMD/SMT, Voltage Rating (DC)=75V, Weight=7.1E-05oz, Width=0.85mm
U1: library part CMP-0471-00165-1, "High Efficiency Standalone Nickel Battery Charger, 4.5 to 34 V Vin, 16-pin SOP (FE-16-EPV-BC), 0 to 85 degC, Pb-Free", Float Voltage=Adj, Manufacturer="Linear Technology", Max Charge Current(A)=4, Battery Chemistry="NiCd, NiMH", ComponentLink1Description="Manufacturer URL", ComponentLink1URL=http://www.linear.com/, ComponentLink2Description=Datasheet, ComponentLink2URL=http://cds.linear.com/docs/en/datasheet/4010fb.pdf, ComponentLink3Description="Package Specification", ComponentLink3URL=http://cds.linear.com/docs/en/packaging/05081663__J_FE16(BC).pdf, DatasheetVersion="Rev. B", Mounting Technology="Surface Mount", Number of Cells="1 to 16", PackageDescription="16-Pin Plastic TSSOP, Body 5 x 4.4 mm, Pitch 0.65 mm", PackageReference=FE-16, PackageVersion="Rev. J, 11/2012", PartNumber=LTC4010CFE#PBF, RoHS=TRUE, Type of Charger=Switching, Vin Max(V)=34, Vin Min(V)=4.5
U2: library part "IC Buck boost converter MC34063", "DC/DC converter control circuit, 8-Pin SO, Tape and Reel", Supplier Part Number 1=497-7850-1-ND, Code_IPC=SOIC127P600-8, Code_JEDEC=MS-012-AA, ComponentLink1Description="Manufacturer URL", ComponentLink1URL=http://www.st.com, ComponentLink2Description=Datasheet, ComponentLink2URL=http://www.st.com/internet/com/TECHNICAL_RESOURCES/TECHNICAL_LITERATURE/DATASHEET/CD00001232.pdf, ComponentLink3Description="Package Specification", ComponentLink3URL=http://www.st.com/internet/com/TECHNICAL_RESOURCES/TECHNICAL_LITERATURE/PACKAGE_INFORMATION/CD00004680.pdf, DatasheetVersion=Nov-2007, PackageDescription="8-Pin Small Outline Integrated Circuit 1.27 mm Pitch", PackageReference=SO8, PackageVersion=Dec-2002, Supplier 1=Digi-Key

## Free pads (board coordinates)
  round 106.3 hole 106.3: ""(98.43,98.43) ""(98.43,1326.57) ""(1951.57,98.43) ""(1951.57,1326.57)

## Via types
v1: diameter 50, hole 28, Top Layer to Bottom Layer, 13 vias
v2: diameter 23.62, hole 11.81, Top Layer to Bottom Layer, 9 vias

## Nets (pads, with @x,y where several pads share a name; then routed paths per layer and width w, separated by ;. In a path a pad name is that pad's centre, name@x,y a point inside that pad or via, vN(x,y) a via of type N, cw(c..) or ccw(c..) an arc to the next point about the centre after c; other vN are vias at no path point)
+12: C9.1 D2.2 P1.1 R2.1 R3.1 R4.1 R9.1 U2.6 | length 1691.6
  Top Layer w10: R9.1 300,1144 ; U2.6 300,1098 300,1144 ; R2.1 R4.1 R3.1 1099.38,990.84 1014.73,906.2 904.5,906.2 882.65,928.05 882.65,960.33 882.65,1040.84 883.83,1042.02 883.83,1158.36 883.83,1220.17 844,1260 C9.1 523.68,1260 407.69,1144 300,1144
BAT: C2.1 D1.2 P2.1 R5.2 R6.2 U1.10 | length 1927
  Top Layer w10: P2.1 909.84,248.29 1178.66,248.29 ; C2.1@1041.22,248.81 1045.24,252.83 1045.24,322.54 1084.61,361.91 R6.2 ; R5.2 1285.89,101.08 1202.72,101.08 1179.1,124.7 1179.1,248.29 1178.66,248.29 ; R5.2@1344.46,119.17 1344.46,98.13 1476.35,98.13 1852.33,474.11 D1.2@1852.33,539.46 ; U1.10 1388.84,513.51 1365.76,513.51 1344.46,492.2 1344.46,407.18 1304.1,366.83 1216.5,366.83 1178.66,328.98 1178.66,248.29
BGATE: Q2.3 U1.12 | length 319.3
  Top Layer w10: U1.12 1512.53,565.41 1623.98,676.87 1643.67,696.55 Q2.3
CHRG: LED2.2 U1.2 | length 232.5
  Top Layer w10: U1.2 1166.4,642.9 1127.43,642.9 1100.36,669.98 1100.36,709.98 LED2.2
FAULT: LED3.2 U1.1 | length 223
  Top Layer w10: U1.1 1166.4,668.49 1135.31,668.49 1123.98,679.82 1123.98,700.49 1169.26,745.76 1197.09,745.76 LED3.2
GND: C1.2 C2.2 C3.2 C4.2 C5.2 C6.2 C7.2 C8.2 C9.2 P1.2 P2.2 P3.2 P4.2 Q2.2 R7.1 R10.2 R11.2 U1.3 U1.4 U1.13 U1.17 U2.2 U2.4 | length 342.1
  Top Layer w10: U1.4 U1.17@1265.55,591 ; U1.3 1239.96,616.59 U1.17@1265.55,591 ; U1.13 1291.14,591 v2(1278.34,578.2) U1.17@1265.55,591
  other v1: 1036.45,53.9 990.13,400.13 1298.28,436.71 1694.85,530.21 557.67,637.15 1009.81,736.91 1253.91,1270.37 1026.34,1291.78 1631.86,1310.72
  other v2: 1235.04,534.9 1278.34,534.9 1321.65,534.9 1235.04,578.2 1321.65,578.2 1235.04,621.51 1278.34,621.51 1321.65,621.51
NetC4_1: C4.1 U1.11 | length 195.2
  Top Layer w10: U1.11 1390.29,539.1 1466.47,539.1 1501.93,503.64 C4.1@1562.7,503.64 ; C4.1@1561.11,512.57 C4.1@1566.11,517.57
NetC7_1: C7.1 U2.3 | length 197.7
  Top Layer w10: U2.3 300,785 321,764 C7.1
NetD3_1: D3.1 L2.2 U2.1 | length 1427.5
  Top Layer w10: v1(131,784) 133.02,781.98 200,781.98 ; U2.1 200,781.98 ; L2.2@455,425.02 482,452.02 482,499.98 200,781.98 ; D3.1 603,1072.69 603,1108 v1(663,1168)
  Bottom Layer w10: v1(131,784) 279,784 v1(663,1168)
NetD4_1: R10.1 R11.1 U2.5 | length 407.7
  Top Layer w10: U2.5 350,1077.73 374.27,1102 449,1102 484,1067 R11.1 424,933 R10.1
NetL1_1: L1.1 Q1.3 Q2.1 | length 1010.4
  Top Layer w10: Q2.1 1800.94,659.15 1804.88,655.21 ; Q1.3@1748,986.91 1757.84,986.91 1804.88,939.87 1804.88,659.15 1804.88,655.21 ; L1.1 1792.29,232.97 1858.24,232.97 1915.32,290.06 1915.32,543.01 1872.84,585.49 1831.5,585.49 1804.88,612.12 1804.88,655.21
NetL2_1: L2.1 R1.2 R9.2 U2.7 | length 930.9
  Top Layer w10: L2.1@69.98,473.02 R1.2 ; R1.2@71,1038 R9.2 106,1109 237,1109 250,1096 U2.7
NetLED1_1: LED1.1 R2.2 | length 83
  Top Layer w10: R2.2@1296.15,924.82 R2.2 ; LED1.1 R2.2@1301.15,924.82
NetLED2_1: LED2.1 R3.2 | length 82.1
  Top Layer w10: R3.2@1176.15,924.82 R3.2 ; LED2.1 R3.2@1181.15,924.82
NetLED3_1: LED3.1 R4.2 | length 83
  Top Layer w10: R4.2@1236.15,924.82 R4.2 ; LED3.1 R4.2@1241.15,924.82
NetR1_1: R1.1 U2.8 | length 73.8
  Top Layer w10: R1.1@132.02,1038 143.76,1026.27 197.73,1026.27 U2.8
NetR7_2: R7.2 U1.8 | length 97.8
  Top Layer w10: R7.2@1163.5,426.87 1135.8,454.57 1135.8,477.06 1147.37,488.64 U1.8
READY: LED1.2 U1.16 | length 284.8
  Top Layer w10: LED1.2 1339.3,751.67 1418.28,751.67 1442.88,727.06 1442.88,690.39 1420.99,668.49 1390.29,668.49 U1.16 U1.16@1371.85,667.77
SENSE: L1.2 R5.1 U1.9 | length 394.2
  Top Layer w10: R5.1@1277.04,315.65 R5.1@1288.85,315.65 ; R5.1 1389.56,314.66 ; U1.9@1378.59,488.64 U1.9 1389.56,314.66 ; L1.2 1433.04,246.75 1399.57,280.21 1399.57,304.65 1389.56,314.66
TGATE: Q1.1 U1.14 | length 438.9
  Top Layer w10: U1.14 1476.12,616.6 1662.37,802.85 1715.52,802.85 1728.31,790.06 Q1.1@1746.03,790.06
VBOOST: C8.1 D3.2 U1.15 | length 1132.4
  Top Layer w10: D3.2 749,860 C8.1 878,862 897,843 v1(929,843) ; U1.15 1459.18,642.18 1497.14,680.14 v1(1497.14,736.1)
  Bottom Layer w10: v1(929,843) 1159.62,843 1266.52,736.1 v1(1497.14,736.1)
VCDIV: R8.1 U1.7 | length 120.1
  Top Layer w10: R8.1 1054.34,514.23 U1.7
VCELL: C3.1 C5.1 R6.1 R8.2 U1.6 | length 392.1
  Top Layer w10: R6.1 1011.78,461.31 984.22,488.87 C3.1 C5.1 996.94,574.43 1043.2,574.43 R8.2 1100.76,580.41 1140.62,540.54 1166.4,540.54 U1.6
VLOAD: C1.1 D1.1 D2.1 P3.1 Q1.2 Q1.4 | length 1958.3
  Top Layer w10: D2.1@970.44,961.32 1071.82,1062.69 1248,1062.69 C1.1 1257.84,1064.66 1299.18,1064.66 1372.02,991.83 1372.02,952.46 1428.12,896.35 1490.13,896.35 1488.16,898.32 Q1.4@1488.16,902.26 ; Q1.4 Q1.4@1488.16,902.26 ; P3.1@1488.16,1177.06 1488.16,1079.43 ; Q1.2@1742.09,902.26 Q1.4@1488.16,902.26 ; D1.1@1852.33,627.26 1852.33,983.95 1756.86,1079.43 1488.16,1079.43 ; Q1.4@1488.16,902.26 1488.16,1079.43
VTEMP: C6.1 P4.1 U1.5 | length 406.8
  Top Layer w10: P4.1 792.71,632.85 C6.1 934.89,632.52 1076.93,632.52 1144.04,565.41 U1.5
pads on no net: P1. P2. P3. P4.0

## Polygon pours and split planes (outlines as drawn)
GND on Bottom Layer "Bottom Layer-GND" (solid, pour order 6): 2050,1425 2050,0 0,0 0,1425
GND on Top Layer "Top Layer-GND" (solid, pour order 8): 0,1425 2050,1425 2050,0 0,0

## Keep-outs
Top Layer:
  lines w10: 6,1419 0,1425 ; 0,1425 2050,1425 ; 0,1425 0,0 625,0 2050,0 2050,1425 ; 2050,1425 2050,1425
Bottom Layer:
  the board outline again, w10

## Other copper
Top Layer:
  region net GND: 504.56,1

## Silkscreen, mask and mechanical layers (free items; w line width, h text height)
Top Overlay:
  text "12V" at 767,1125 h60